# Altium PCB CarrierBoard.PcbDoc (part 2 of 2)
Units mil, origin at the board's own origin, x right, y up, seen from the top; angles counter-clockwise.
Board outline 3784.29 x 4050 mil, 2 copper layers (Top Layer, Bottom Layer), stack 63 mil thick; 58 components, 54 nets, 251 pads, 77 vias.
Unrouted connection lines stored in the file: 2.
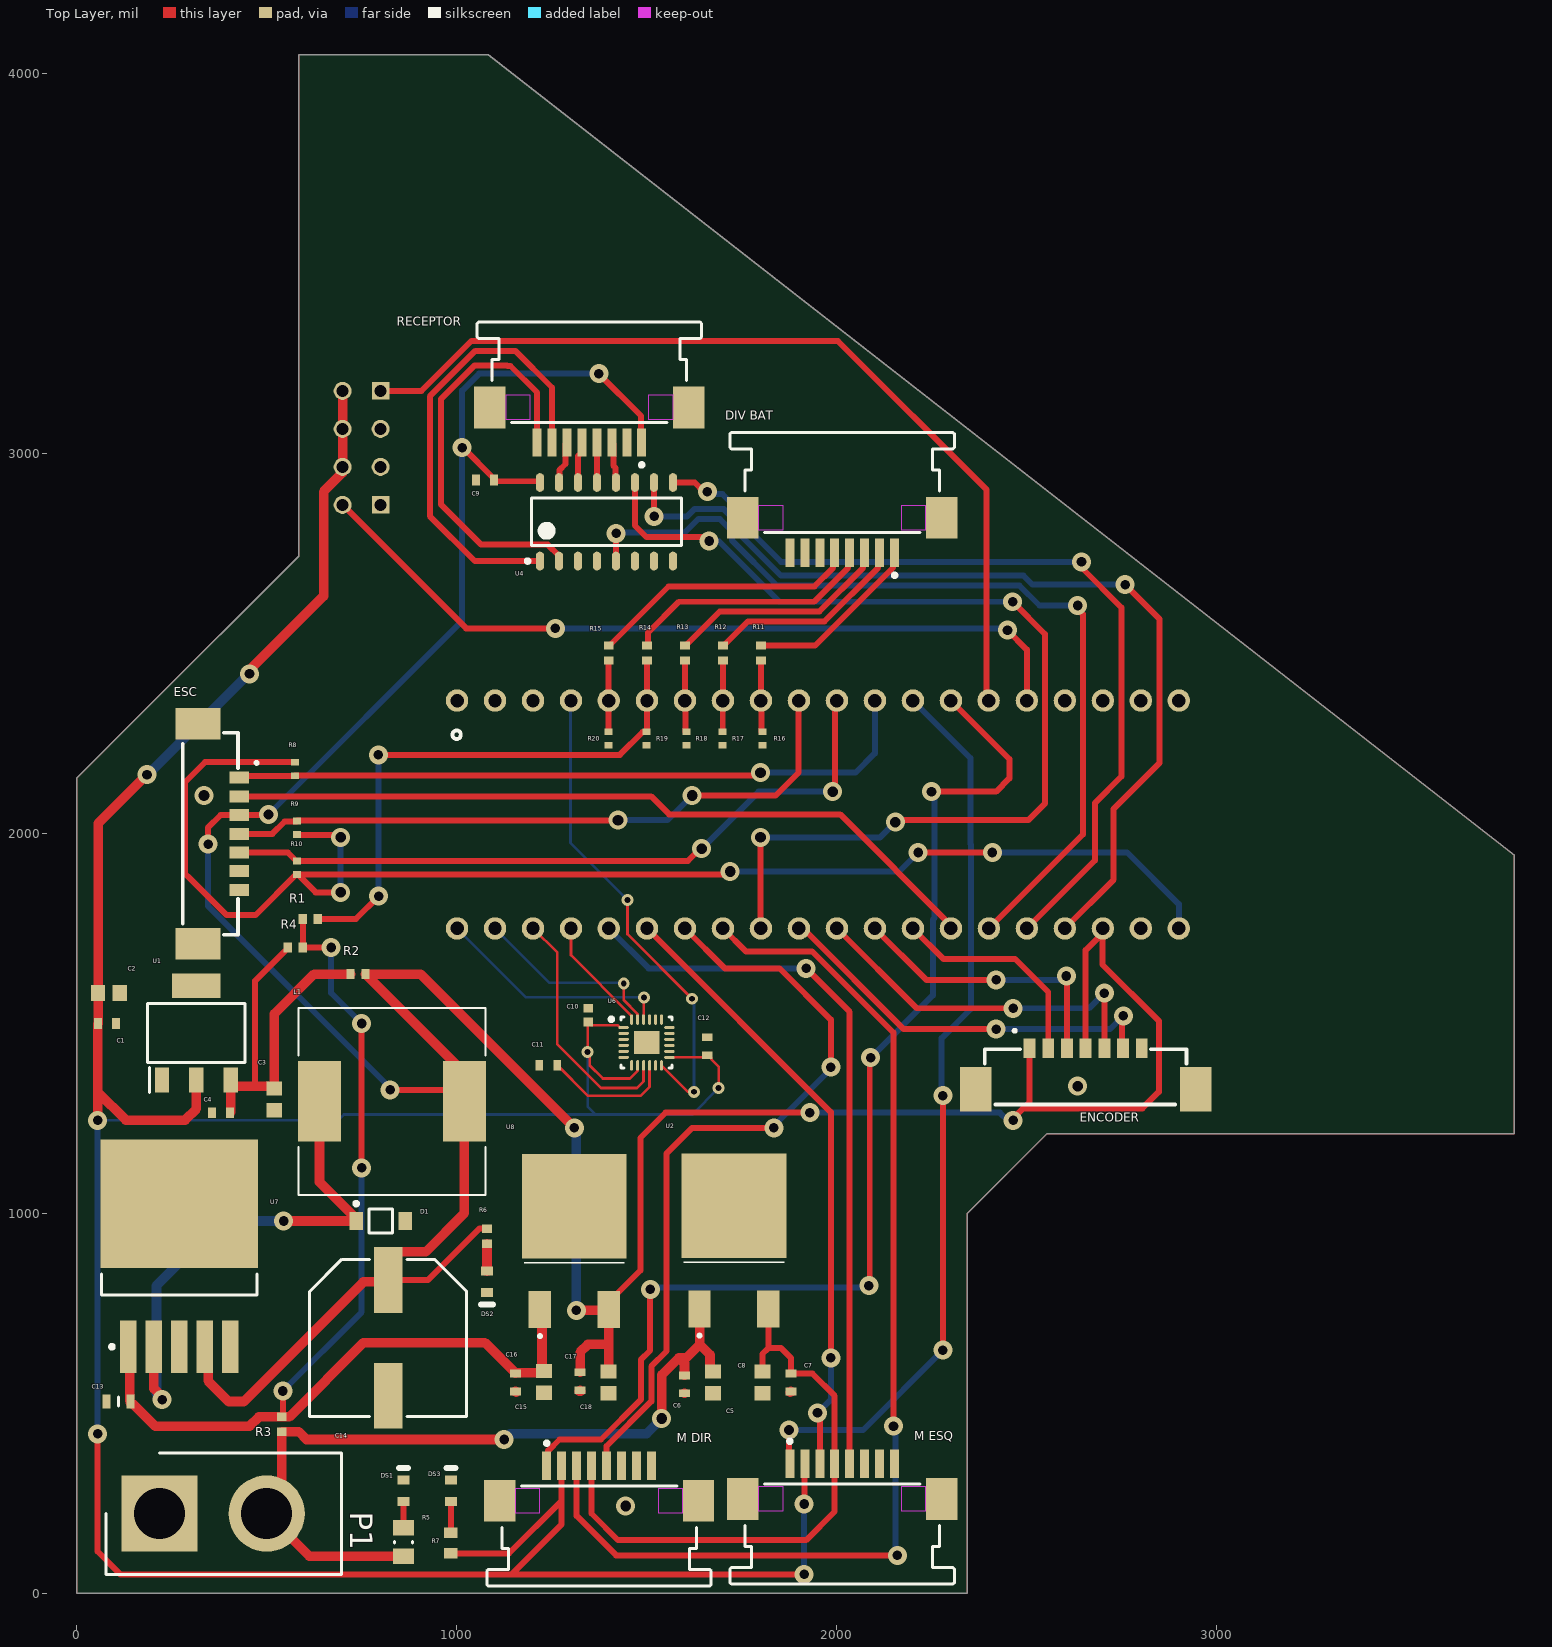
[diagram p0: Top Layer view]

## Via types
v1: diameter 50, hole 25.29, Top Layer to Bottom Layer, 56 vias
v2: diameter 50, hole 28, Top Layer to Bottom Layer, 14 vias
v3: diameter 31.48, hole 15.74, Top Layer to Bottom Layer, 6 vias
v4: diameter 31.48, hole 14.74, Top Layer to Bottom Layer, 1 vias

## Nets (pads, with @x,y where several pads share a name; then routed paths per layer and width w, separated by ;. In a path a pad name is that pad's centre, name@x,y a point inside that pad or via, vN(x,y) a via of type N, cw(c..) or ccw(c..) an arc to the next point about the centre after c; other vN are vias at no path point) (continued)
SMUX1: (continued)
  Top Layer w15.74: U4.10 1519.76,2923.59 1519.76,2835.24 v1(1520,2835) ; U3.24 2729.72,1878.57 2729.72,2064.72 2850,2185 2850,2565 v1(2760,2655)
  Bottom Layer w15.74: v1(1520,2835) 1607.04,2835 1625.65,2853.61 1703.42,2853.61 1750.92,2806.11 1750.92,2781.7 1854.01,2678.61 2492.16,2678.61 2515.77,2655 v1(2760,2655)
SMUX2: U3.32 U4.11 | length 2782.9
  Top Layer w15.74: U4.11 1469.51,2810.49 1500,2780 1655,2780 v1(1665,2770) ; v2(1800,1990) 1800.58,1989.42 1800.58,1750.58 U3.32 ; v2(2155,2030) 2160,2035 2505,2035 2548.55,2078.55 2548.55,2525.2 v1(2463.75,2610)
  Bottom Layer w15.74: v1(1665,2770) 1689.81,2770 1849.81,2610 v1(2463.75,2610) ; v2(1800,1990) 2115,1990 v2(2155,2030)
SPI_CS: U3.40 U6.22 | length 632.1
  Top Layer w7: U3.40 U3.40@1008.08,1750 ; U6.22 1492.97,1511.16 v3(1492.97,1567.97)
  Bottom Layer w7: U3.40 1182.39,1568.76 1492.18,1568.76 v3(1492.97,1567.97)
SPI_MISO: U3.38 U6.9 | length 655.9
  Top Layer w7: U3.38 1265,1686.15 1265,1445 1380,1330 1475,1330 1492.13,1347.13 U6.9
SPI_MOSI: U3.37 U6.24 | length 305.7
  Top Layer w7: U3.37 1301.15,1679.64 1460.63,1520.16 U6.24
SPI_SCK: U3.39 U6.23 | length 508.7
  Top Layer w7: v3(1440,1605) 1440,1561.2 1476.21,1524.99 1476.21,1510.48 U6.23
  Bottom Layer w7: U3.39 1243.65,1607.5 1437.5,1607.5 v3(1440,1605)
T_ARMA: ESC.1 R8.1 U3.12 | length 1848.8
  Top Layer w15.74: ESC.1@437.53,2146.89 ESC.1 432.1,2151.3 574.01,2151.3 R8.1 1777.28,2152.28 1785,2160 v2(1800,2160)
  Bottom Layer w15.74: v2(1800,2160) 2050,2160 2101.15,2211.15 U3.12
T_DIR: ESC.5 R10.1 U3.11 | length 1891.7
  Top Layer w15.74: ESC.5 555.71,1950.04 578.03,1927.72 R10.1 1608.54,1927.72 1640.82,1960 v2(1645,1960) ; v2(1990,2110) 1995.58,2115.58 1995.58,2344.42 U3.11
  Bottom Layer w15.74: v2(1645,1960) 1795,2110 v2(1990,2110)
T_ESQ: ESC.4 R9.2 U3.10 | length 1729.4
  Top Layer w15.74: ESC.4 514.88,1999.25 547.36,2031.73 579.01,2031.73 R9.2 580.99,2033.71 1423.71,2033.71 v2(1425,2035) ; v2(1620,2100) 1840,2100 1900,2160 1900,2348.85 U3.10
  Bottom Layer w15.74: v2(1425,2035) 1555,2035 v2(1620,2100)
UART_RX: U3.15 U5.RX | length 2379
  Top Layer w15.74: U5.RX 907.62,3165 1038.85,3296.23 2003.77,3296.23 2395,2905 2395,2355.36 U3.15 U3.15@2390,2350
UART_TX: U3.16 U5.TX | length 2092.9
  Top Layer w15.74: U5.TX 1025,2540 v1(1260,2540) ; v1(2450,2535) 2501.15,2483.85 U3.16
  Bottom Layer w15.74: v1(1260,2540) 2445,2540 v1(2450,2535)
VBAT: C5.2 C6.2 P1.2 R3.1 R5.2 U2.1 | length 2154.6
  Top Layer w25.29: R5.2 612.4,97.6 P1.2 500,257.49 540,297.49 R3.1 584.68,425.32 605,405 v1(1125,405) ; v2(1540,460) 1540,575 1585,620 ; C6.2 1600,605 1585,620 ; U2.1 1640,747.8 1640,655 ; C5.2 1673.03,583.54 1666.98,589.6 1666.98,628.02 1640,655 ; 1585,620 1605,620 1640,655
  Bottom Layer w10: P1.2@497.5,207.5 P1.2
  Bottom Layer w25.29: v1(1125,405) 1140,420 1500,420 v2(1540,460)
pads on no net: "DIV BAT.6" "DIV BAT.7" "DIV BAT.8" "DIV BAT.MP1" "DIV BAT.MP2" "M DIR.7" "M DIR.8" "M DIR.MP1" "M DIR.MP2" "M ESQ.7" "M ESQ.8" "M ESQ.MP1" "M ESQ.MP2" ENCODER.8 ENCODER.9 ESC.8 ESC.9 RECEPTOR.MP1 RECEPTOR.MP2 U1.4 U3.1 U3.2 U3.3 U3.17, U3.18 U4.3 U4.4 U4.6 U5.GPIO0 U5.GPIO2 U6.2 U6.3 U6.4 U6.5 U6.6 U6.7 U6.14 U6.15 U6.16 U6.17 U6.19 U6.21 U6.25 U7.6

## Polygon pours and split planes (outlines as drawn)
0 on Top Layer "Top Layer-GND" (solid, remove dead copper, shelved, pour order 5): 0,2145.71 0,0 2344.29,0 2344.29,1000 2554.29,1210 3784.29,1210 3784.29,1942.6 1083.42,4050 584.29,4050 584.29,2730 169.29,2315
no net on Top Layer "Top Layer-No Net" (solid, shelved, pour order 28): 125,2570
0 on Bottom Layer "Bottom Layer-GND" (solid, remove dead copper, shelved, pour order 29): 0,2145.71 0,0 2344.29,0 2344.29,1000 2554.29,1210 3784.29,1210 3784.29,1942.6 1083.42,4050 584.29,4050 584.29,2730 169.29,2315

## Silkscreen, mask and mechanical layers (free items; w line width, h text height)
Top Overlay:
  circle w10: c1000,2260 r11.18

## Text inside footprints (layer, text, board x,y; h text height)
U3: Mechanical 29 "BLUE PILL" at 1296.15,2310 h20 r180